# Altium PCB AVRDevBoard.PcbDoc (part 2 of 3)
Units mm, origin at the board's own origin, x right, y up, seen from the top; angles counter-clockwise.
Board outline 84.2 x 55.88 mm, 2 copper layers (Top Layer, Bottom Layer); 37 components, 46 nets, 157 pads, 38 vias.
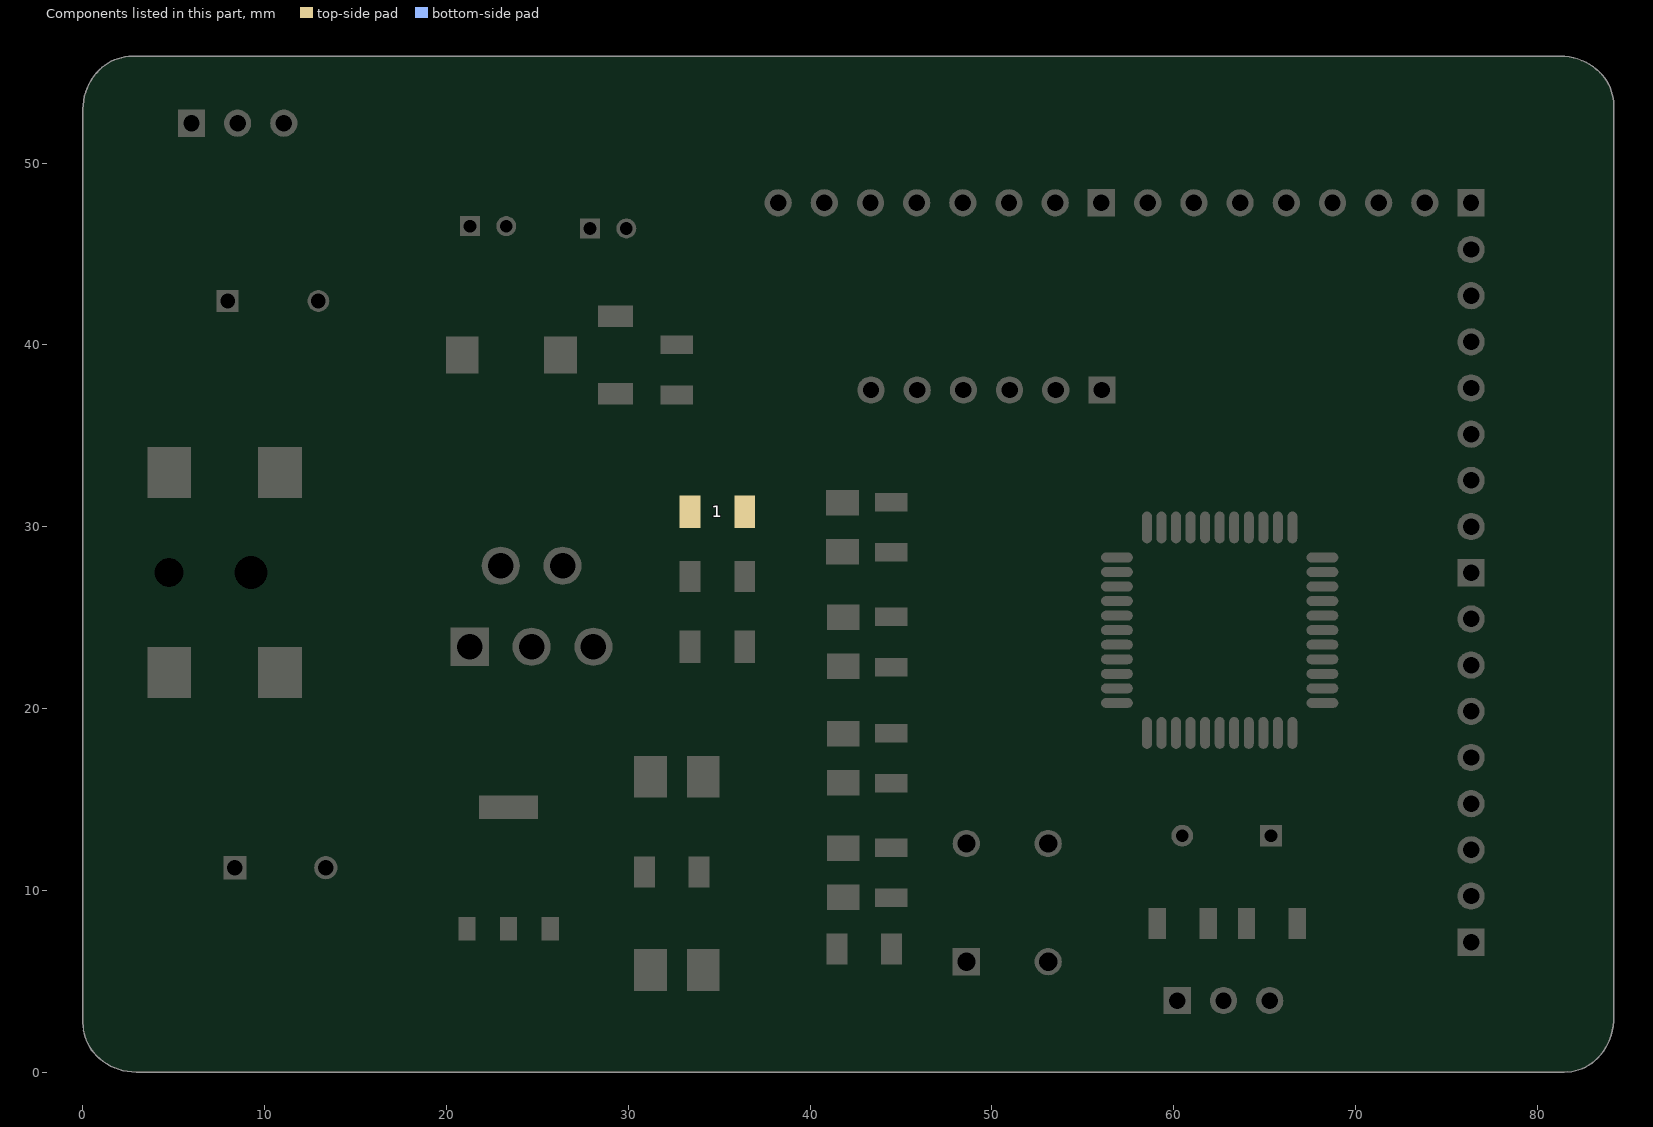
[diagram p2: the components of this part, seen from the top]

## Via types
v1: diameter 0.6, hole 0.3, Top Layer to Bottom Layer, 24 vias
v2: diameter 0.5, hole 0.3, Top Layer to Bottom Layer, 13 vias
v3: diameter 0.7, hole 0.4, Top Layer to Bottom Layer, 1 vias

## Nets (pads, with @x,y where several pads share a name; then routed paths per layer and width w, separated by ;. In a path a pad name is that pad's centre, name@x,y a point inside that pad or via, vN(x,y) a via of type N, cw(c..) or ccw(c..) an arc to the next point about the centre after c; other vN are vias at no path point) (continued)
copper on no net: (continued)
  Top Layer w0.025: 60.751,36.503 61.056,36.503 ; 60.751,36.528 61.03,36.528 ; 60.751,36.553 61.03,36.553 ; 60.751,36.579 61.03,36.579 ; 60.751,36.604 61.03,36.604 ; 60.751,36.63 61.03,36.63 ; 60.751,36.655 61.005,36.655 ; 60.751,36.68 61.005,36.68 ; 60.751,36.706 61.03,36.706 ; 60.751,36.731 61.005,36.731 ; 60.751,36.757 61.005,36.757 ; 60.751,36.782 61.005,36.782 ; 60.751,36.807 61.03,36.807 ; 60.751,36.833 61.005,36.833 ; 60.751,36.858 61.005,36.858 ; 60.751,36.884 61.005,36.884 ; 60.751,36.909 61.03,36.909 ; 60.751,36.934 61.03,36.934 ; 60.751,36.96 61.03,36.96 ; 60.751,36.985 61.03,36.985 ; 60.751,37.011 61.03,37.011 ; 60.751,37.036 61.03,37.036 ; 60.776,36.426 61.132,36.426 ; 60.776,36.452 61.132,36.452 ; 60.776,36.477 61.081,36.477 ; 60.776,37.061 61.132,37.061 ; 60.776,37.087 61.132,37.087 ; 60.802,36.35 61.615,36.35 ; 60.802,36.376 61.589,36.376 ; 60.802,36.401 61.64,36.401 ; 60.802,37.112 61.665,37.112 ; 60.802,37.138 61.64,37.138 ; 60.802,37.163 61.615,37.163 ; 60.853,36.299 61.564,36.299 ; 60.853,36.325 61.589,36.325 ; 60.853,37.188 61.589,37.188 ; 60.853,37.214 61.589,37.214 ; 60.903,36.274 61.513,36.274 ; 60.903,37.239 61.564,37.239 ; 60.903,37.265 61.564,37.265 ; 60.929,36.249 61.513,36.249 ; 60.98,37.29 61.462,37.29 ; 61.005,36.198 61.462,36.198 ; 61.005,36.223 61.462,36.223 ; 61.005,37.315 61.462,37.315 ; 61.081,37.341 61.335,37.341 ; 61.081,37.366 61.335,37.366 ; 61.132,36.172 61.284,36.172 ; 61.284,36.426 61.665,36.426 ; 61.284,36.452 61.665,36.452 ; 61.284,37.087 61.665,37.087 ; 61.31,37.061 61.665,37.061 ; 61.361,36.477 61.665,36.477 ; 61.361,36.503 61.665,36.503 ; 61.386,37.011 61.665,37.011 ; 61.386,37.036 61.665,37.036 ; 61.411,36.528 61.691,36.528 ; 61.411,36.553 61.691,36.553 ; 61.411,36.96 61.691,36.96 ; 61.411,36.985 61.691,36.985 ; 61.437,36.579 61.691,36.579 ; 61.437,36.604 61.691,36.604 ; 61.437,36.63 61.691,36.63 ; 61.437,36.655 61.691,36.655 ; 61.437,36.68 61.691,36.68 ; 61.437,36.706 61.691,36.706 ; 61.437,36.731 61.691,36.731 ; 61.437,36.757 61.691,36.757 ; 61.437,36.782 61.691,36.782 ; 61.437,36.807 61.691,36.807 ; 61.437,36.833 61.691,36.833 ; 61.437,36.858 61.691,36.858 ; 61.437,36.884 61.691,36.884 ; 61.437,36.909 61.691,36.909 ; 61.437,36.934 61.691,36.934 ; 61.869,34.445 62.123,34.445 ; 61.869,34.471 62.123,34.471 ; 61.869,34.496 62.123,34.496 ; 61.869,34.521 62.123,34.521 ; 61.869,34.547 62.123,34.547 ; 61.869,34.572 62.123,34.572 ; 61.869,34.598 62.123,34.598 ; 61.869,34.623 62.123,34.623 ; 61.869,34.648 62.123,34.648 ; 61.869,34.674 62.123,34.674 ; 61.869,34.699 62.123,34.699 ; 61.869,34.725 62.123,34.725 ; 61.869,34.75 62.123,34.75 ; 61.869,34.775 62.123,34.775 ; 61.869,34.801 62.123,34.801 ; 61.869,34.826 62.123,34.826 ; 61.869,34.852 62.123,34.852 ; 61.869,34.877 62.123,34.877 ; 61.869,34.902 62.123,34.902 ; 61.869,34.928 62.123,34.928 ; 61.869,34.953 62.123,34.953 ; 61.869,34.979 62.123,34.979 ; 61.869,35.004 62.123,35.004 ; 61.869,35.029 62.123,35.029 ; 61.869,35.055 62.123,35.055 ; 61.869,35.08 62.123,35.08 ; 61.869,35.106 62.123,35.106 ; 61.869,35.131 62.123,35.131 ; 61.869,35.156 62.123,35.156 ; 61.869,35.182 62.123,35.182 ; 61.869,35.207 62.173,35.207 ; 61.869,35.233 62.173,35.233 ; 61.869,35.258 62.224,35.258 ; 61.869,35.283 62.224,35.283 ; 61.869,35.309 62.326,35.309 ; 61.869,35.334 62.758,35.334 ; 61.869,35.36 62.758,35.36 ; 61.869,35.385 62.758,35.385 ; 61.869,35.41 62.758,35.41 ; 61.869,35.436 62.707,35.436 ; 61.869,35.461 62.681,35.461 ; 61.869,35.487 62.123,35.487 ; 61.869,35.512 62.123,35.512 ; 61.869,35.537 62.123,35.537 ; 61.869,35.563 62.123,35.563 ; 61.869,35.588 62.123,35.588 ; 61.869,35.614 62.123,35.614 ; 61.869,35.639 62.123,35.639 ; 61.869,35.664 62.123,35.664 ; 61.869,35.69 62.123,35.69 ; 61.869,35.715 62.123,35.715 ; 61.869,35.741 62.123,35.741 ; 61.869,35.766 62.123,35.766 ; 61.869,35.791 62.123,35.791 ; 61.869,35.817 62.123,35.817 ; 61.869,35.842 62.123,35.842 ; 61.869,35.868 62.123,35.868 ; 61.869,35.893 62.123,35.893 ; 61.869,35.918 62.123,35.918 ; 61.869,35.944 62.123,35.944 ; 61.869,35.969 62.123,35.969 ; 61.869,35.995 62.123,35.995 ; 61.869,36.02 62.123,36.02 ; 61.869,36.045 62.123,36.045 ; 61.869,36.071 62.123,36.071 ; 61.869,36.096 62.123,36.096 ; 61.869,36.122 62.123,36.122 ; 61.869,36.147 62.123,36.147 ; 61.869,36.172 62.123,36.172 ; 61.869,36.198 62.123,36.198 ; 61.869,36.223 62.123,36.223 ; 61.869,36.249 62.123,36.249 ; 61.869,36.274 62.656,36.274 ; 61.869,36.299 62.732,36.299 ; 61.869,36.325 62.732,36.325 ; 61.869,36.35 62.758,36.35 ; 61.869,36.376 62.758,36.376 ; 61.869,36.401 62.758,36.401 ; 61.869,36.426 62.25,36.426 ; 61.869,36.452 62.25,36.452 ; 61.869,36.477 62.199,36.477 ; 61.869,36.503 62.173,36.503 ; 61.869,36.528 62.148,36.528 ; 61.869,36.553 62.123,36.553 ; 61.869,36.579 62.123,36.579 ; 61.869,36.604 62.123,36.604 ; 61.869,36.63 62.123,36.63 ; 61.869,36.655 62.123,36.655 ; 61.869,36.68 62.123,36.68 ; 61.869,36.706 62.123,36.706 ; 61.869,36.731 62.123,36.731 ; 61.869,36.757 62.123,36.757 ; 61.869,36.782 62.123,36.782 ; 61.869,36.807 62.123,36.807 ; 61.869,36.833 62.123,36.833 ; 61.869,36.858 62.123,36.858 ; 61.869,36.884 62.123,36.884 ; 61.869,36.909 62.123,36.909 ; 61.869,36.934 62.123,36.934 ; 61.869,36.96 62.123,36.96 ; 61.869,36.985 62.123,36.985 ; 61.869,37.011 62.173,37.011 ; 61.869,37.036 62.173,37.036 ; 61.869,37.061 62.25,37.061 ; 61.869,37.087 62.25,37.087 ; 61.869,37.112 62.783,37.112 ; 61.869,37.138 62.758,37.138 ; 61.869,37.163 62.758,37.163 ; 61.869,37.188 62.732,37.188 ; 61.869,37.214 62.732,37.214 ; 61.869,37.239 62.681,37.239 ; 61.869,37.265 62.681,37.265 ; 61.869,37.29 62.123,37.29 ; 61.869,37.315 62.123,37.315 ; 61.894,34.394 62.123,34.394 ; 61.894,34.42 62.123,34.42 ; 61.894,37.366 61.919,37.366 ; 61.945,41.049 65.171,41.049 ; 61.945,41.075 65.171,41.075 ; 61.945,41.1 65.171,41.1 ; 61.945,41.125 65.12,41.125 ; 61.945,41.151 65.12,41.151 ; 61.945,41.176 65.12,41.176 ; 61.945,41.202 65.12,41.202 ; 61.945,41.227 65.094,41.227 ; 61.945,41.252 65.094,41.252 ; 61.945,41.278 65.094,41.278 ; 61.945,41.303 65.069,41.303 ; 61.945,41.329 65.069,41.329 ; 61.945,41.354 65.069,41.354 ; 61.945,41.379 65.069,41.379 ; 61.945,41.405 65.069,41.405 ; 61.945,41.43 65.069,41.43 ; 61.945,41.456 65.069,41.456 ; 61.945,41.481 65.069,41.481 ; 61.945,41.506 65.069,41.506 ; 61.945,41.532 65.069,41.532 ; 61.945,41.557 65.069,41.557 ; 61.945,41.583 65.069,41.583 ; 61.945,41.608 65.069,41.608 ; 61.945,41.633 65.069,41.633 ; 61.945,41.659 65.069,41.659 ; 61.945,41.684 65.069,41.684 ; 61.945,41.71 65.069,41.71 ; 61.945,41.735 65.069,41.735 ; 61.945,41.76 65.069,41.76 ; 61.945,41.786 65.069,41.786 ; 61.945,41.811 65.069,41.811 ; 61.945,41.837 65.069,41.837 ; 61.945,41.862 65.069,41.862 ; 61.945,41.887 65.094,41.887 ; 61.945,41.913 65.094,41.913 ; 61.945,41.938 65.094,41.938 ; 61.945,41.964 65.094,41.964 ; 61.945,41.989 65.12,41.989 ; 61.945,42.014 65.12,42.014 ; 61.945,42.04 65.12,42.04 ; 61.945,42.065 65.12,42.065 ; 61.945,42.091 65.171,42.091 ; 61.945,42.116 65.171,42.116 ; 61.945,42.141 65.171,42.141 ; 61.945,42.167 65.196,42.167 ; 61.996,40.998 65.196,40.998 ; 61.996,41.024 65.196,41.024 ; 61.996,42.192 65.221,42.192 ; 62.072,37.341 62.097,37.341 ; 62.072,37.366 62.097,37.366 ; 62.097,40.973 65.221,40.973 ; 62.097,42.218 65.221,42.218 ; 62.173,35.487 62.656,35.487 ; 62.173,35.512 62.656,35.512 ; 62.173,36.249 62.656,36.249 ; 62.173,37.29 62.656,37.29 ; 62.173,42.243 65.247,42.243 ; 62.224,36.198 62.605,36.198 ; 62.224,36.223 62.605,36.223 ; 62.224,37.315 62.605,37.315 ; 62.25,35.537 62.554,35.537 ; 62.25,40.948 65.247,40.948 ; 62.326,36.172 62.504,36.172 ; 62.326,37.341 62.504,37.341 ; 62.326,37.366 62.504,37.366 ; 62.326,42.268 65.247,42.268 ; 62.351,35.563 62.453,35.563 ; 62.351,40.922 65.272,40.922 ; 62.377,35.309 62.783,35.309 ; 62.427,36.426 62.783,36.426 ; 62.427,36.452 62.783,36.452 ; 62.427,37.087 62.783,37.087 ; 62.453,35.258 62.783,35.258 ; 62.453,35.283 62.783,35.283 ; 62.453,37.061 62.783,37.061 ; 62.453,40.897 65.272,40.897 ; 62.504,35.233 62.783,35.233 ; 62.504,36.477 62.783,36.477 ; 62.504,36.503 62.783,36.503 ; 62.504,37.011 62.783,37.011 ; 62.504,37.036 62.783,37.036 ; 62.504,42.294 65.272,42.294 ; 62.529,35.131 62.783,35.131 ; 62.529,35.156 62.783,35.156 ; 62.529,35.182 62.783,35.182 ; 62.529,35.207 62.783,35.207 ; 62.529,36.528 62.783,36.528 ; 62.529,36.553 62.783,36.553 ; 62.529,36.579 62.783,36.579 ; 62.529,36.604 62.783,36.604 ; 62.529,36.909 62.783,36.909 ; 62.529,36.934 62.783,36.934 ; 62.529,36.96 62.783,36.96 ; 62.529,36.985 62.783,36.985 ; 62.554,34.394 62.783,34.394 ; 62.554,34.42 62.783,34.42 ; 62.554,34.445 62.783,34.445 ; 62.554,34.471 62.783,34.471 ; 62.554,34.496 62.783,34.496 ; 62.554,34.521 62.783,34.521 ; 62.554,34.547 62.783,34.547 ; 62.554,34.572 62.783,34.572 ; 62.554,34.598 62.783,34.598 ; 62.554,34.623 62.783,34.623 ; 62.554,34.648 62.783,34.648 ; 62.554,34.674 62.783,34.674 ; 62.554,34.699 62.783,34.699 ; 62.554,34.725 62.783,34.725 ; 62.554,34.75 62.783,34.75 ; 62.554,34.775 62.783,34.775 ; 62.554,34.801 62.783,34.801 ; 62.554,34.826 62.783,34.826 ; 62.554,34.852 62.783,34.852 ; 62.554,34.877 62.783,34.877 ; 62.554,34.902 62.783,34.902 ; 62.554,34.928 62.783,34.928 ; 62.554,34.953 62.783,34.953 ; 62.554,34.979 62.783,34.979 ; 62.554,35.004 62.783,35.004 ; 62.554,35.029 62.783,35.029 ; 62.554,35.055 62.783,35.055 ; 62.554,35.08 62.783,35.08 ; 62.554,35.106 62.783,35.106 ; 62.554,36.63 62.783,36.63 ; 62.554,36.655 62.783,36.655 ; 62.554,36.68 62.783,36.68 ; 62.554,36.706 62.783,36.706 ; 62.554,36.731 62.834,36.731 ; 62.554,36.757 62.834,36.757 ; 62.554,36.782 62.834,36.782 ; 62.554,36.807 62.834,36.807 ; 62.554,36.833 62.783,36.833 ; 62.554,36.858 62.783,36.858 ; 62.554,36.884 62.783,36.884 ; 62.656,40.871 65.298,40.871 ; 62.707,42.319 65.298,42.319 ; 62.707,42.345 65.323,42.345 ; 62.783,39.017 65.171,39.017 ; 62.783,44.173 69.641,44.173 ; 62.783,44.199 69.641,44.199 ; 62.808,38.966 65.171,38.966 ; 62.808,38.992 65.171,38.992 ; 62.808,39.043 65.196,39.043 ; 62.808,39.068 65.196,39.068 ; 62.808,44.097 69.616,44.097 ; 62.808,44.123 69.616,44.123 ; 62.808,44.148 69.616,44.148 ; 62.808,44.224 69.616,44.224 ; 62.834,39.093 65.196,39.093 ; 62.834,39.119 65.221,39.119 ; 62.834,44.25 69.59,44.25 ; 62.859,38.941 65.171,38.941 ; 62.859,40.821 65.348,40.821 ; 62.859,40.846 65.298,40.846 ; 62.859,44.046 69.565,44.046 ; 62.859,44.072 69.565,44.072 ; 62.885,38.916 65.12,38.916 ; 62.885,39.144 65.247,39.144 ; 62.885,39.17 65.247,39.17 ; 62.885,39.195 65.247,39.195 ; 62.885,39.22 65.272,39.22 ; 62.885,42.37 65.348,42.37 ; 62.885,43.996 69.539,43.996 ; 62.885,44.021 69.539,44.021 ; 62.885,44.275 69.539,44.275 ; 62.885,44.3 69.539,44.3 ; 62.935,34.648 63.316,34.648 ; 62.935,34.674 63.215,34.674 ; 62.935,34.699 63.215,34.699 ; 62.935,34.725 63.215,34.725 ; 62.935,34.75 63.215,34.75 ; 62.935,34.775 63.215,34.775 ; 62.935,34.801 63.215,34.801 ; 62.935,36.579 63.215,36.579 ; 62.935,36.604 63.215,36.604 ; 62.935,36.63 63.215,36.63 ; 62.935,36.655 63.215,36.655 ; 62.935,36.68 63.926,36.68 ; 62.935,36.706 63.926,36.706 ; 62.935,36.731 63.926,36.731 ; 62.935,36.757 63.926,36.757 ; 62.935,36.782 63.926,36.782 ; 62.935,36.807 63.926,36.807 ; 62.935,36.833 63.926,36.833 ; 62.935,36.858 63.926,36.858 ; 62.935,36.884 63.926,36.884 ; 62.935,36.909 63.215,36.909 ; 62.935,36.934 63.215,36.934 ; 62.935,38.865 65.12,38.865 ; 62.935,38.89 65.12,38.89 ; 62.935,39.246 65.272,39.246 ; 62.935,43.945 69.489,43.945 ; 62.935,43.97 69.489,43.97 ; 62.935,44.326 69.489,44.326 ; 62.935,44.351 69.489,44.351 ; 62.961,34.572 63.875,34.572 ; 62.961,34.598 63.875,34.598 ; 62.961,34.623 63.875,34.623 ; 62.961,34.826 63.215,34.826 ; 62.961,34.852 63.215,34.852 ; 62.961,34.877 63.875,34.877 ; 62.961,36.503 63.266,36.503 ; 62.961,36.528 63.215,36.528 ; 62.961,36.553 63.215,36.553 ; 62.961,36.96 63.215,36.96 ; 62.961,36.985 63.215,36.985 ; 62.961,37.011 63.215,37.011 ; 62.961,37.036 63.215,37.036 ; 62.961,38.814 65.094,38.814 ; 62.961,38.839 65.094,38.839 ; 62.961,39.271 65.272,39.271 ; 62.986,34.547 63.875,34.547 ; 62.986,34.902 63.875,34.902 ; 62.986,34.928 63.875,34.928 ; 62.986,34.953 63.875,34.953 ; 62.986,35.36 63.85,35.36 ; 62.986,35.385 63.85,35.385 ; 62.986,35.41 63.85,35.41 ; 62.986,36.401 63.85,36.401 ; 62.986,36.426 63.316,36.426 ; 62.986,36.452 63.316,36.452 ; 62.986,36.477 63.266,36.477 ; 62.986,37.061 63.316,37.061 ; 62.986,37.087 63.316,37.087 ; 62.986,37.112 63.85,37.112 ; 62.986,37.138 63.85,37.138 ; 62.986,38.789 65.094,38.789 ; 62.986,39.297 65.298,39.297 ; 62.986,39.322 65.298,39.322 ; 62.986,39.347 65.298,39.347 ; 62.986,42.395 65.348,42.395 ; 62.986,43.843 69.438,43.843 ; 62.986,43.869 69.438,43.869 ; 62.986,43.894 69.438,43.894 ; 62.986,43.919 69.463,43.919 ; 62.986,44.377 64.586,44.377 ; 62.986,44.402 64.51,44.402 ; 63.037,34.496 63.875,34.496 ; 63.037,34.521 63.875,34.521 ; 63.037,34.979 63.875,34.979 ; 63.037,35.334 63.85,35.334 ; 63.037,35.436 63.062,35.436 ; 63.037,36.35 63.875,36.35 ; 63.037,36.376 63.875,36.376 ; 63.037,37.163 63.824,37.163 ; 63.037,38.763 64.459,38.763 ; 63.037,39.373 65.348,39.373 ; 63.037,39.398 65.348,39.398 ; 63.037,39.424 65.348,39.424 ; 63.037,40.795 65.348,40.795 ; 63.037,43.767 69.387,43.767 ; 63.037,43.792 69.387,43.792 ; 63.037,43.818 69.387,43.818 ; 63.037,44.427 64.485,44.427 ; 63.037,44.453 64.485,44.453 ; 63.088,34.445 63.875,34.445 ; 63.088,34.471 63.875,34.471 ; 63.088,35.004 63.875,35.004 ; 63.088,35.029 63.875,35.029 ; 63.088,35.309 63.266,35.309 ; 63.088,35.436 63.799,35.436 ; 63.088,35.461 63.774,35.461 ; 63.088,36.299 63.85,36.299 ; 63.088,36.325 63.85,36.325 ; 63.088,37.188 63.774,37.188 ; 63.088,37.214 63.774,37.214 ; 63.088,38.712 64.434,38.712 ; 63.088,38.738 64.459,38.738 ; 63.088,39.449 65.348,39.449 ; 63.088,39.474 65.399,39.474 ; 63.088,40.719 65.425,40.719 ; 63.088,40.744 65.399,40.744 ; 63.088,40.77 65.399,40.77 ; 63.088,43.716 69.336,43.716 ; 63.088,43.742 69.336,43.742 ; 63.088,44.478 64.409,44.478 ; 63.113,35.487 63.748,35.487 ; 63.113,35.512 63.748,35.512 ; 63.113,36.274 63.748,36.274 ; 63.113,37.239 63.748,37.239 ; 63.113,37.265 63.748,37.265 ; 63.113,38.687 64.358,38.687 ; 63.113,39.5 65.399,39.5 ; 63.113,40.643 65.552,40.643 ; 63.113,40.668 65.501,40.668 ; 63.113,40.694 65.45,40.694 ; 63.113,42.421 65.399,42.421 ; 63.113,42.446 65.399,42.446 ; 63.113,42.472 65.45,42.472 ; 63.113,42.497 65.501,42.497 ; 63.113,43.665 69.311,43.665 ; 63.113,43.691 69.311,43.691 ; 63.113,44.504 64.358,44.504 ; 63.113,44.529 64.358,44.529 ; 63.139,35.258 63.215,35.258 ; 63.139,35.283 63.215,35.283 ; 63.139,36.249 63.748,36.249 ; 63.139,38.636 64.307,38.636 ; 63.139,38.662 64.307,38.662 ; 63.139,39.525 65.399,39.525 ; 63.139,39.551 65.399,39.551 ; 63.139,40.541 65.704,40.541 ; 63.139,40.567 65.602,40.567 ; 63.139,40.592 65.602,40.592 ; 63.139,40.617 65.552,40.617 ; 63.139,42.522 65.526,42.522 ; 63.139,42.548 65.526,42.548 ; 63.139,43.615 69.285,43.615 ; 63.139,43.64 69.285,43.64 ; 63.139,44.554 64.307,44.554 ; 63.164,34.42 63.596,34.42 ; 63.164,35.055 63.875,35.055 ; 63.164,35.08 63.875,35.08 ; 63.164,37.29 63.647,37.29 ; 63.164,39.576 65.399,39.576 ; 63.164,42.573 65.602,42.573 ; 63.164,42.599 65.602,42.599 ; 63.189,35.537 63.647,35.537 ; 63.189,38.611 64.256,38.611 ; 63.189,39.601 65.399,39.601 ; 63.189,40.465 65.729,40.465 ; 63.189,40.49 65.729,40.49 ; 63.189,40.516 65.729,40.516 ; 63.189,42.624 65.704,42.624 ; 63.189,42.649 65.729,42.649 ; 63.189,43.589 69.235,43.589 ; 63.189,44.58 64.256,44.58 ; 63.215,34.394 63.52,34.394 ; 63.215,36.198 63.697,36.198 ; 63.215,36.223 63.697,36.223 ; 63.215,37.315 63.647,37.315 ; 63.215,38.585 64.231,38.585 ; 63.215,39.627 65.399,39.627 ; 63.215,39.652 65.425,39.652 ; 63.215,39.678 65.45,39.678 ; 63.215,40.338 65.729,40.338 ; 63.215,40.363 65.729,40.363 ; 63.215,40.389 65.729,40.389 ; 63.215,40.414 65.729,40.414 ; 63.215,40.44 65.78,40.44 ; 63.215,42.675 65.831,42.675 ; 63.215,42.7 65.831,42.7 ; 63.215,42.726 65.933,42.726 ; 63.215,43.513 69.209,43.513 ; 63.215,43.538 69.209,43.538 ; 63.215,43.564 69.209,43.564 ; 63.215,44.605 64.205,44.605 ; 63.215,44.631 64.205,44.631 ; 63.266,38.535 64.18,38.535 ; 63.266,38.56 64.18,38.56 ; 63.266,39.703 65.45,39.703 ; 63.266,39.728 65.501,39.728 ; 63.266,40.287 65.729,40.287 ; 63.266,40.313 65.729,40.313 ; 63.266,42.751 69.158,42.751 ; 63.266,42.776 69.158,42.776 ; 63.266,42.802 69.158,42.802 ; 63.266,42.827 69.158,42.827 ; 63.266,43.488 69.158,43.488 ; 63.266,44.656 64.155,44.656 ; 63.266,44.681 64.155,44.681 ; 63.291,38.484 64.104,38.484 ; 63.291,38.509 64.104,38.509 ; 63.291,39.754 65.501,39.754 ; 63.291,39.779 65.501,39.779 ; 63.291,40.186 65.679,40.186 ; 63.291,40.211 65.679,40.211 ; 63.291,40.236 65.704,40.236 ; 63.291,40.262 65.704,40.262 ; 63.291,42.853 69.133,42.853 ; 63.291,42.878 69.133,42.878 ; 63.291,43.411 69.133,43.411 ; 63.291,43.437 69.133,43.437 ; 63.291,43.462 69.158,43.462 ; 63.316,37.341 63.52,37.341 ; 63.316,37.366 63.52,37.366 ; 63.316,38.458 64.028,38.458 ; 63.316,39.805 65.501,39.805 ; 63.316,39.83 65.526,39.83 ; 63.316,40.109 65.628,40.109 ; 63.316,40.135 65.628,40.135 ; 63.316,40.16 65.628,40.16 ; 63.316,42.903 69.108,42.903 ; 63.316,42.929 69.108,42.929 ; 63.316,42.954 69.108,42.954 ; 63.316,42.98 69.108,42.98 ; 63.316,43.005 69.108,43.005 ; 63.316,43.386 69.108,43.386 ; 63.316,44.707 64.078,44.707 ; 63.316,44.732 64.028,44.732 ; 63.342,35.563 63.469,35.563 ; 63.342,36.172 63.545,36.172 ; 63.367,38.433 64.002,38.433 ; 63.367,39.855 65.526,39.855 ; 63.367,39.881 65.526,39.881 ; 63.367,39.982 65.577,39.982 ; 63.367,40.008 65.602,40.008 ; 63.367,40.033 65.602,40.033 ; 63.367,40.059 65.602,40.059 ; 63.367,40.084 65.602,40.084 ; 63.367,43.03 69.057,43.03 ; 63.367,43.056 69.057,43.056 ; 63.367,43.081 69.057,43.081 ; 63.367,43.107 69.057,43.107 ; 63.367,43.284 69.057,43.284 ; 63.367,43.31 69.057,43.31 ; 63.367,43.335 69.057,43.335 ; 63.367,43.361 69.057,43.361 ; 63.367,44.758 63.977,44.758 ; 63.367,44.783 63.977,44.783 ; 63.418,38.382 63.977,38.382 ; 63.418,38.408 63.977,38.408 ; 63.418,39.906 65.552,39.906 ; 63.418,39.932 65.552,39.932 ; 63.418,39.957 65.577,39.957 ; 63.418,43.132 69.006,43.132 ; 63.418,43.157 69.006,43.157 ; 63.418,43.183 69.006,43.183 ; 63.418,43.208 69.006,43.208 ; 63.418,43.234 69.006,43.234 ; 63.418,43.259 69.006,43.259 ; 63.418,44.808 63.926,44.808 ; 63.443,38.357 63.875,38.357 ; 63.443,44.834 63.875,44.834 ; 63.443,44.859 63.875,44.859 ; 63.469,38.306 63.85,38.306 ; 63.469,38.331 63.85,38.331 ; 63.469,44.885 63.85,44.885 ; 63.52,38.281 63.774,38.281 ; 63.52,44.91 63.774,44.91 ; 63.545,34.648 63.875,34.648 ; 63.545,35.309 63.875,35.309 ; 63.545,37.061 63.875,37.061 ; 63.545,37.087 63.85,37.087 ; 63.545,38.255 63.748,38.255 ; 63.545,44.935 63.748,44.935 ; 63.545,44.961 63.748,44.961 ; 63.596,35.258 63.875,35.258 ; 63.596,35.283 63.875,35.283 ; 63.596,36.426 63.799,36.426 ; 63.596,36.452 63.799,36.452 ; 63.596,37.011 63.875,37.011 ; 63.596,37.036 63.875,37.036 ; 63.596,38.204 63.672,38.204 ; 63.596,38.23 63.672,38.23 ; 63.596,44.986 63.672,44.986 ; 63.596,45.012 63.672,45.012 ; 63.621,34.394 63.875,34.394 ; 63.621,34.42 63.875,34.42 ; 63.621,34.674 63.875,34.674 ; 63.621,34.699 63.875,34.699 ; 63.621,34.725 63.875,34.725 ; 63.621,34.75 63.875,34.75 ; 63.621,34.775 63.875,34.775 ; 63.621,34.801 63.875,34.801 ; 63.621,34.826 63.875,34.826 ; 63.621,34.852 63.875,34.852 ; 63.621,35.106 63.875,35.106 ; 63.621,35.131 63.875,35.131 ; 63.621,35.156 63.875,35.156 ; 63.621,35.182 63.875,35.182 ; 63.621,35.207 63.875,35.207 ; 63.621,35.233 63.875,35.233 ; 63.621,36.934 63.875,36.934 ; 63.621,36.96 63.875,36.96 ; 63.621,36.985 63.875,36.985 ; 63.647,36.477 63.748,36.477 ; 63.647,36.503 63.748,36.503 ; 63.647,36.909 63.875,36.909 ; 64.053,36.198 64.307,36.198 ; 64.053,36.223 64.307,36.223 ; 64.053,36.249 64.307,36.249 ; 64.053,36.274 64.307,36.274 ; 64.053,36.299 64.307,36.299 ; 64.053,36.325 64.307,36.325 ; 64.053,36.35 64.307,36.35 ; 64.053,36.376 64.307,36.376 ; 64.053,36.401 64.307,36.401 ; 64.053,36.426 64.307,36.426 ; 64.053,36.452 64.307,36.452 ; 64.053,36.477 64.307,36.477 ; 64.053,36.503 64.307,36.503 ; 64.053,36.528 64.307,36.528 ; 64.053,36.553 64.307,36.553 ; 64.053,36.579 64.307,36.579 ; 64.053,36.604 64.307,36.604 ; 64.053,36.63 64.307,36.63 ; 64.053,36.655 64.307,36.655 ; 64.053,36.68 64.307,36.68 ; 64.053,36.706 64.307,36.706 ; 64.053,36.731 64.307,36.731 ; 64.053,36.757 64.307,36.757 ; 64.053,36.782 64.307,36.782 ; 64.053,36.807 64.307,36.807 ; 64.053,36.833 64.307,36.833 ; 64.053,36.858 64.307,36.858 ; 64.053,36.884 64.307,36.884 ; 64.053,36.909 64.307,36.909 ; 64.053,36.934 64.307,36.934 ; 64.053,36.96 64.358,36.96 ; 64.053,36.985 64.358,36.985 ; 64.053,37.011 64.358,37.011 ; 64.053,37.036 64.358,37.036 ; 64.053,37.061 64.459,37.061 ; 64.053,37.087 64.459,37.087 ; 64.053,37.112 64.967,37.112 ; 64.053,37.138 64.967,37.138 ; 64.053,37.163 64.942,37.163 ; 64.053,37.188 64.942,37.188 ; 64.053,37.214 64.942,37.214 ; 64.053,37.239 64.917,37.239 ; 64.053,37.265 64.891,37.265 ; 64.053,37.29 64.307,37.29 ; 64.053,37.315 64.332,37.315 ; 64.078,34.42 64.358,34.42 ; 64.078,34.445 64.358,34.445 ; 64.078,34.471 64.358,34.471 ; 64.078,34.496 64.358,34.496 ; 64.078,34.521 64.358,34.521 ; 64.078,34.547 64.358,34.547 ; 64.078,34.572 64.358,34.572 ; 64.078,34.598 64.358,34.598 ; 64.078,34.623 64.358,34.623 ; 64.078,34.648 64.358,34.648 ; 64.078,34.674 64.358,34.674 ; 64.078,34.699 64.358,34.699 ; 64.078,34.725 64.358,34.725 ; 64.078,34.75 64.358,34.75 ; 64.078,34.775 64.358,34.775 ; 64.078,34.801 64.358,34.801 ; 64.078,34.826 64.358,34.826 ; 64.078,34.852 64.358,34.852 ; 64.078,34.877 64.358,34.877 ; 64.078,34.902 64.358,34.902 ; 64.078,34.928 64.358,34.928 ; 64.078,34.953 64.358,34.953 ; 64.078,34.979 64.358,34.979 ; 64.078,35.004 64.358,35.004 ; 64.078,35.029 64.358,35.029 ; 64.078,35.055 64.358,35.055 ; 64.078,35.08 64.358,35.08 ; 64.078,35.106 64.358,35.106 ; 64.078,35.131 64.358,35.131 ; 64.078,35.156 64.358,35.156 ; 64.078,35.182 64.358,35.182 ; 64.078,35.207 64.409,35.207 ; 64.078,35.233 64.409,35.233 ; 64.078,35.258 64.434,35.258 ; 64.078,35.283 64.434,35.283 ; 64.078,35.309 64.536,35.309 ; 64.078,35.334 64.79,35.334 ; 64.078,35.36 64.84,35.36 ; 64.078,35.385 64.84,35.385 ; 64.078,35.41 64.866,35.41 ; 64.078,35.436 64.358,35.436 ; 64.078,35.461 64.358,35.461 ; 64.078,35.487 64.358,35.487 ; 64.078,35.512 64.358,35.512 ; 64.104,34.394 64.358,34.394 ; 64.104,35.537 64.358,35.537 ; 64.104,37.341 64.129,37.341 ; 64.104,37.366 64.129,37.366 ; 64.383,35.436 64.917,35.436 ; 64.383,35.461 64.917,35.461 ; 64.409,35.487 64.866,35.487 ; 64.409,35.512 64.866,35.512 ; 64.409,37.29 64.84,37.29 ; 64.409,37.315 64.79,37.315 ; 64.51,35.537 64.79,35.537 ; 64.51,37.341 64.713,37.341 ; 64.51,37.366 64.713,37.366 ; 64.586,38.763 65.069,38.763 ; 64.612,35.309 64.79,35.309 ; 64.612,35.563 64.688,35.563 ; 64.637,37.061 64.967,37.061 ; 64.637,37.087 64.967,37.087 ; 64.637,44.377 67.787,44.377 ; 64.663,38.712 65.069,38.712 ; 64.663,38.738 65.069,38.738 ; 64.688,35.258 64.739,35.258 ; 64.688,35.283 64.764,35.283 ; 64.713,36.985 65.018,36.985 ; 64.713,37.011 65.018,37.011 ; 64.713,37.036 65.018,37.036 ; 64.713,38.687 65.069,38.687 ; 64.739,36.198 65.018,36.198 ; 64.739,36.223 65.018,36.223 ; 64.739,36.249 65.018,36.249 ; 64.739,36.274 65.018,36.274 ; 64.739,36.299 65.018,36.299 ; 64.739,36.325 65.018,36.325 ; 64.739,36.35 65.018,36.35 ; 64.739,36.376 65.018,36.376 ; 64.739,36.401 65.018,36.401 ; 64.739,36.426 65.018,36.426 ; 64.739,36.452 65.018,36.452 ; 64.739,36.477 65.018,36.477 ; 64.739,36.503 65.018,36.503 ; 64.739,36.528 65.018,36.528 ; 64.739,36.553 65.018,36.553 ; 64.739,36.579 65.018,36.579 ; 64.739,36.604 65.018,36.604 ; 64.739,36.63 65.018,36.63 ; 64.739,36.655 65.018,36.655 ; 64.739,36.68 65.018,36.68 ; 64.739,36.706 65.018,36.706 ; 64.739,36.731 65.018,36.731 ; 64.739,36.757 65.018,36.757 ; 64.739,36.782 65.018,36.782 ; 64.739,36.807 65.018,36.807 ; 64.739,36.833 65.018,36.833 ; 64.739,36.858 65.018,36.858 ; 64.739,36.884 65.018,36.884 ; 64.739,36.909 65.018,36.909 ; 64.739,36.934 65.018,36.934 ; 64.739,36.96 65.018,36.96 ; 64.739,44.402 67.685,44.402 ; 64.79,38.636 65.018,38.636 ; 64.79,38.662 65.018,38.662 ; 64.815,44.427 67.609,44.427 ; 64.84,44.453 67.584,44.453 ; 64.866,34.877 65.171,34.877 ; 64.866,34.902 65.171,34.902 ; 64.866,34.928 65.171,34.928 ; 64.866,34.953 65.171,34.953 ; 64.866,34.979 65.171,34.979 ; 64.866,35.004 65.171,35.004 ; 64.866,35.029 65.171,35.029 ; 64.866,35.055 65.171,35.055 ; 64.866,38.611 65.018,38.611 ; 64.891,34.648 65.831,34.648 ; 64.891,34.674 65.196,34.674 ; 64.891,34.699 65.196,34.699 ; 64.891,34.725 65.171,34.725 ; 64.891,34.75 65.171,34.75 ; 64.891,34.775 65.171,34.775 ; 64.891,34.801 65.171,34.801 ; 64.891,34.826 65.171,34.826 ; 64.891,34.852 65.171,34.852 ; 64.891,35.08 65.171,35.08 ; 64.891,35.106 65.171,35.106 ; 64.891,35.131 65.171,35.131 ; 64.891,35.156 65.171,35.156 ; 64.891,35.182 65.171,35.182 ; 64.891,35.207 65.171,35.207 ; 64.891,35.233 65.196,35.233 ; 64.891,35.258 65.221,35.258 ; 64.891,35.283 65.221,35.283 ; 64.891,35.309 65.298,35.309 ; 64.942,34.572 65.831,34.572 ; 64.942,34.598 65.831,34.598 ; 64.942,34.623 65.831,34.623 ; 64.942,35.334 65.831,35.334 ; 64.942,35.36 65.831,35.36 ; 64.942,35.385 65.831,35.385 ; 64.942,38.585 64.967,38.585 ; 64.942,44.478 67.482,44.478 ; 64.967,34.496 65.831,34.496 ; 64.967,34.521 65.831,34.521 ; 64.967,34.547 65.831,34.547 ; 64.967,35.41 65.831,35.41 ; 64.967,35.436 65.831,35.436 ; 64.967,44.504 67.431,44.504 ; 64.967,44.529 64.993,44.529 ; 64.993,35.461 65.831,35.461 ; 65.018,44.529 67.431,44.529 ; 65.044,34.445 65.526,34.445 ; 65.044,34.471 65.526,34.471 ; 65.044,35.487 65.501,35.487 ; 65.044,35.512 65.501,35.512 ; 65.069,34.42 65.501,34.42 ; 65.069,44.554 67.355,44.554 ; 65.12,35.537 65.45,35.537 ; 65.171,34.394 65.399,34.394 ; 65.171,44.58 67.253,44.58 ; 65.221,35.563 65.323,35.563 ; 65.272,44.605 67.152,44.605 ; 65.272,44.631 67.152,44.631 ; 65.348,44.656 67.076,44.656 ; 65.374,44.681 67.05,44.681 ; 65.399,35.309 65.831,35.309 ; 65.399,44.707 67.025,44.707 ; 65.399,44.732 67.025,44.732 ; 65.399,44.758 67.025,44.758 ; 65.399,44.783 67.025,44.783 ; 65.399,44.808 67.025,44.808 ; 65.45,44.834 66.974,44.834 ; 65.45,44.859 66.974,44.859 ; 65.45,44.885 66.974,44.885 ; 65.45,44.91 66.974,44.91 ; 65.45,44.935 66.974,44.935 ; 65.45,44.961 66.974,44.961 ; 65.45,44.986 66.974,44.986 ; 65.45,45.012 66.974,45.012 ; 65.475,35.258 65.831,35.258 ; 65.475,35.283 65.831,35.283 ; 65.475,45.037 66.949,45.037 ; 65.475,45.062 66.949,45.062 ; 65.475,45.088 66.949,45.088 ; 65.475,45.113 66.949,45.113 ; 65.475,45.139 66.949,45.139 ; 65.475,45.164 66.949,45.164 ; 65.501,34.674 65.831,34.674 ; 65.501,34.699 65.831,34.699 ; 65.501,34.725 65.831,34.725 ; 65.501,34.75 65.831,34.75 ; 65.501,35.207 65.831,35.207 ; 65.501,35.233 65.831,35.233 ; 65.501,45.189 66.949,45.189 ; 65.501,45.215 66.949,45.215 ; 65.501,45.24 66.923,45.24 ; 65.501,45.266 66.923,45.266 ; 65.501,45.291 66.923,45.291 ; 65.501,45.316 66.923,45.316 ; 65.501,45.342 66.923,45.342 ; 65.501,45.367 66.923,45.367 ; 65.501,45.393 66.923,45.393 ; 65.501,45.418 66.872,45.418 ; 65.552,34.394 65.831,34.394 ; 65.552,34.42 65.831,34.42 ; 65.552,34.445 65.831,34.445 ; 65.552,34.471 65.831,34.471 ; 65.552,34.775 65.831,34.775 ; 65.552,34.801 65.831,34.801 ; 65.552,34.826 65.831,34.826 ; 65.552,34.852 65.831,34.852 ; 65.552,34.877 65.831,34.877 ; 65.552,34.902 65.831,34.902 ; 65.552,34.928 65.831,34.928 ; 65.552,34.953 65.831,34.953 ; 65.552,34.979 65.831,34.979 ; 65.552,35.004 65.831,35.004 ; 65.552,35.029 65.831,35.029 ; 65.552,35.055 65.831,35.055 ; 65.552,35.08 65.831,35.08 ; 65.552,35.106 65.831,35.106 ; 65.552,35.131 65.831,35.131 ; 65.552,35.156 65.831,35.156 ; 65.552,35.182 65.831,35.182 ; 65.552,35.487 65.831,35.487 ; 65.552,35.512 65.831,35.512 ; 65.552,35.537 65.831,35.537 ; 65.552,35.563 65.831,35.563 ; 65.552,35.588 65.831,35.588 ; 65.552,35.614 65.831,35.614 ; 65.552,35.639 65.831,35.639 ; 65.552,35.664 65.831,35.664 ; 65.552,35.69 65.831,35.69 ; 65.552,35.715 65.831,35.715 ; 65.552,35.741 65.831,35.741 ; 65.552,35.766 65.831,35.766 ; 65.552,35.791 65.831,35.791 ; 65.552,35.817 65.831,35.817 ; 65.552,35.842 65.831,35.842 ; 65.552,35.868 65.831,35.868 ; 65.552,35.893 65.831,35.893 ; 65.552,35.918 65.831,35.918 ; 65.552,35.944 65.831,35.944 ; 65.552,35.969 65.831,35.969 ; 65.552,35.995 65.831,35.995 ; 65.552,36.02 65.806,36.02 ; 65.552,45.443 66.872,45.443 ; 65.552,45.469 66.872,45.469 ; 65.552,45.494 66.872,45.494 ; 65.552,45.52 66.872,45.52 ; 65.552,45.545 66.872,45.545 ; 65.552,45.57 66.872,45.57 ; 65.552,45.596 66.872,45.596 ; 65.602,36.35 66.542,36.35 ; 65.602,36.376 66.542,36.376 ; 65.602,36.401 66.593,36.401 ; 65.602,45.621 66.822,45.621 ; 65.602,45.647 66.822,45.647 ; 65.602,45.672 66.822,45.672 ; 65.602,45.697 66.822,45.697 ; 65.602,45.723 66.822,45.723 ; 65.602,45.748 66.822,45.748 ; 65.602,45.774 66.822,45.774 ; 65.602,45.799 66.822,45.799 ; 65.602,45.824 66.822,45.824 ; 65.653,36.299 66.491,36.299 ; 65.653,36.325 66.491,36.325 ; 65.653,36.426 65.958,36.426 ; 65.653,36.452 65.958,36.452 ; 65.653,36.96 65.933,36.96 ; 65.653,36.985 65.933,36.985 ; 65.653,37.011 65.933,37.011 ; 65.653,37.036 65.933,37.036 ; 65.653,37.061 65.958,37.061 ; 65.679,36.934 65.983,36.934 ; 65.704,36.477 65.882,36.477 ; 65.704,36.503 65.882,36.503 ; 65.704,36.833 66.466,36.833 ; 65.704,36.858 66.364,36.858 ; 65.704,36.884 66.364,36.884 ; 65.704,36.909 65.983,36.909 ; 65.704,37.087 65.958,37.087 ; 65.704,37.112 66.491,37.112 ; 65.704,37.138 66.491,37.138 ; 65.704,37.163 66.542,37.163 ; 65.729,36.274 66.466,36.274 ; 65.729,36.528 65.78,36.528 ; 65.729,36.553 65.78,36.553 ; 65.729,36.782 66.491,36.782 ; 65.729,36.807 66.491,36.807 ; 65.729,37.188 66.593,37.188 ; 65.729,37.214 66.568,37.214 ; 65.78,36.249 66.441,36.249 ; 65.78,36.731 66.542,36.731 ; 65.78,36.757 66.491,36.757 ; 65.78,37.239 66.491,37.239 ; 65.78,37.265 66.491,37.265 ; 65.831,36.198 66.364,36.198 ; 65.831,37.29 66.466,37.29 ; 65.882,36.223 66.364,36.223 ; 65.882,36.68 66.593,36.68 ; 65.882,36.706 66.593,36.706 ; 65.882,37.315 66.39,37.315 ; 65.933,35.385 66.212,35.385 ; 65.933,35.41 66.212,35.41 ; 65.933,35.436 66.212,35.436 ; 65.933,35.461 66.212,35.461 ; 65.933,35.487 66.212,35.487 ; 65.933,35.512 66.212,35.512 ; 65.933,35.537 66.187,35.537 ; 65.983,35.258 66.263,35.258 ; 65.983,35.283 66.263,35.283 ; 65.983,35.309 66.263,35.309 ; 65.983,35.334 66.263,35.334 ; 65.983,35.36 66.263,35.36 ; 65.983,37.341 66.263,37.341 ; 65.983,37.366 66.263,37.366 ; 66.009,36.172 66.212,36.172 ; 66.034,35.156 66.288,35.156 ; 66.034,35.182 66.288,35.182 ; 66.034,35.207 66.263,35.207 ; 66.034,35.233 66.263,35.233 ; 66.06,35.004 66.339,35.004 ; 66.06,35.029 66.339,35.029 ; 66.06,35.055 66.339,35.055 ; 66.06,35.08 66.339,35.08 ; 66.06,35.106 66.288,35.106 ; 66.06,35.131 66.288,35.131 ; 66.085,34.928 66.364,34.928 ; 66.085,34.953 66.364,34.953 ; 66.085,34.979 66.339,34.979 ; 66.11,34.902 66.364,34.902 ; 66.11,36.63 66.593,36.63 ; 66.11,36.655 66.593,36.655 ; 66.136,34.801 66.618,34.801 ; 66.136,34.826 66.39,34.826 ; 66.136,34.852 66.39,34.852 ; 66.136,34.877 66.364,34.877 ; 66.161,34.674 66.593,34.674 ; 66.161,34.699 66.593,34.699 ; 66.161,34.725 66.618,34.725 ; 66.161,34.75 66.618,34.75 ; 66.161,34.775 66.618,34.775 ; 66.212,34.572 66.542,34.572 ; 66.212,34.598 66.593,34.598 ; 66.212,34.623 66.593,34.623 ; 66.212,34.648 66.593,34.648 ; 66.237,34.471 66.542,34.471 ; 66.237,34.496 66.542,34.496 ; 66.237,34.521 66.542,34.521 ; 66.237,34.547 66.542,34.547 ; 66.263,34.394 66.491,34.394 ; 66.263,34.42 66.491,34.42 ; 66.263,34.445 66.542,34.445 ; 66.263,36.426 66.593,36.426 ; 66.263,36.452 66.593,36.452 ; 66.263,37.061 66.491,37.061 ; 66.263,37.087 66.491,37.087 ; 66.314,36.477 66.593,36.477 ; 66.314,36.503 66.593,36.503 ; 66.314,36.579 66.593,36.579 ; 66.314,36.604 66.593,36.604 ; 66.364,36.528 66.593,36.528 ; 66.364,36.553 66.593,36.553 ; 66.364,37.036 66.441,37.036 ; 66.39,37.011 66.441,37.011 ; 66.415,34.826 66.644,34.826 ; 66.415,34.852 66.644,34.852 ; 66.415,34.877 66.669,34.877 ; 66.415,34.902 66.669,34.902 ; 66.415,34.928 66.669,34.928 ; 66.441,34.953 66.695,34.953 ; 66.466,34.979 66.695,34.979 ; 66.466,35.004 66.695,35.004 ; 66.466,35.029 66.695,35.029 ; 66.466,35.055 66.695,35.055 ; 66.466,35.08 66.695,35.08 ; 66.491,35.106 66.72,35.106 ; 66.491,35.131 66.72,35.131 ; 66.491,35.156 66.72,35.156 ; 66.491,35.182 66.949,35.182 ; 66.491,42.726 69.209,42.726 ; 66.542,35.207 66.949,35.207 ; 66.542,35.233 66.949,35.233 ; 66.542,35.258 66.923,35.258 ; 66.542,35.283 66.923,35.283 ; 66.568,35.309 66.923,35.309 ; 66.568,35.334 66.923,35.334 ; 66.568,35.36 66.923,35.36 ; 66.568,35.385 66.872,35.385 ; 66.593,35.41 66.872,35.41 ; 66.593,35.436 66.872,35.436 ; 66.593,35.461 66.872,35.461 ; 66.593,35.487 66.822,35.487 ; 66.593,35.512 66.822,35.512 ; 66.593,42.675 69.209,42.675 ; 66.593,42.7 69.209,42.7 ; 66.644,35.537 66.822,35.537 ; 66.644,40.44 69.209,40.44 ; 66.695,36.503 67.025,36.503 ; 66.695,36.528 66.974,36.528 ; 66.695,36.553 66.974,36.553 ; 66.695,36.579 66.974,36.579 ; 66.695,36.604 66.974,36.604 ; 66.695,36.63 66.974,36.63 ; 66.695,36.655 66.974,36.655 ; 66.695,36.68 66.974,36.68 ; 66.695,36.706 66.974,36.706 ; 66.695,36.731 66.974,36.731 ; 66.695,36.757 66.949,36.757 ; 66.695,36.782 66.949,36.782 ; 66.695,36.807 66.949,36.807 ; 66.695,36.833 66.974,36.833 ; 66.695,36.858 66.974,36.858 ; 66.695,36.884 66.974,36.884 ; 66.695,36.909 66.974,36.909 ; 66.695,36.934 66.974,36.934 ; 66.695,36.96 66.974,36.96 ; 66.695,36.985 66.974,36.985 ; 66.695,37.011 67.025,37.011 ; 66.695,37.036 67.025,37.036 ; 66.695,40.287 69.158,40.287 ; 66.695,40.313 69.158,40.313 ; 66.695,40.338 69.209,40.338 ; 66.695,40.363 69.209,40.363 ; 66.695,40.389 69.209,40.389 ; 66.695,40.414 69.209,40.414 ; 66.695,40.465 69.235,40.465 ; 66.695,40.49 69.235,40.49 ; 66.695,40.516 69.235,40.516 ; 66.695,42.649 69.235,42.649 ; 66.72,36.477 67.025,36.477 ; 66.72,40.236 69.133,40.236 ; 66.72,40.262 69.133,40.262 ; 66.72,40.541 69.26,40.541 ; 66.72,42.624 69.235,42.624 ; 66.745,35.055 66.974,35.055 ; 66.745,35.08 66.974,35.08 ; 66.745,35.106 66.974,35.106 ; 66.745,35.131 66.974,35.131 ; 66.745,35.156 66.949,35.156 ; 66.745,36.401 67.609,36.401 ; 66.745,36.426 67.126,36.426 ; 66.745,36.452 67.126,36.452 ; 66.745,37.061 67.101,37.061 ; 66.745,37.087 67.126,37.087 ; 66.745,37.112 67.609,37.112 ; 66.745,37.138 67.584,37.138 ; 66.745,40.186 69.133,40.186 ; 66.745,40.211 69.133,40.211 ; 66.796,34.928 67.025,34.928 ; 66.796,34.953 67.025,34.953 ; 66.796,34.979 67.025,34.979 ; 66.796,35.004 67.025,35.004 ; 66.796,35.029 67.025,35.029 ; 66.796,36.35 67.584,36.35 ; 66.796,36.376 67.584,36.376 ; 66.796,37.163 67.584,37.163 ; 66.796,40.109 69.108,40.109 ; 66.796,40.135 69.108,40.135 ; 66.796,40.16 69.108,40.16 ; 66.822,34.775 67.05,34.775 ; 66.822,34.801 67.05,34.801 ; 66.822,34.826 67.05,34.826 ; 66.822,34.852 67.05,34.852 ; 66.822,34.877 67.05,34.877 ; 66.822,34.902 67.025,34.902 ; 66.822,36.299 67.533,36.299 ; 66.822,36.325 67.558,36.325 ; 66.822,37.188 67.533,37.188 ; 66.822,37.214 67.533,37.214 ; 66.822,40.008 69.057,40.008 ; 66.822,40.033 69.057,40.033 ; 66.822,40.059 69.057,40.059 ; 66.822,40.084 69.057,40.084 ; 66.822,40.567 69.285,40.567 ; 66.822,40.592 69.285,40.592 ; 66.822,42.573 69.26,42.573 ; 66.822,42.599 69.26,42.599 ; 66.847,34.674 67.279,34.674 ; 66.847,34.699 67.279,34.699 ; 66.847,34.725 67.304,34.725 ; 66.847,34.75 67.304,34.75 ; 66.847,39.957 69.006,39.957 ; 66.847,39.982 69.006,39.982 ; 66.872,36.274 67.482,36.274 ; 66.872,37.239 67.533,37.239 ; 66.872,37.265 67.482,37.265 ; 66.872,39.906 69.006,39.906 ; 66.872,39.932 69.006,39.932 ; 66.872,40.617 69.285,40.617 ; 66.872,40.643 69.311,40.643 ; 66.898,34.572 67.253,34.572 ; 66.898,34.598 67.253,34.598 ; 66.898,34.623 67.253,34.623 ; 66.898,34.648 67.279,34.648 ; 66.898,36.249 67.457,36.249 ; 66.898,39.83 69.108,39.83 ; 66.898,39.855 69.057,39.855 ; 66.898,39.881 69.057,39.881 ; 66.898,42.522 69.285,42.522 ; 66.898,42.548 69.285,42.548 ; 66.923,34.445 67.203,34.445 ; 66.923,34.471 67.203,34.471 ; 66.923,34.496 67.253,34.496 ; 66.923,34.521 67.253,34.521 ; 66.923,34.547 67.253,34.547 ; 66.923,37.29 67.457,37.29 ; 66.923,39.728 69.158,39.728 ; 66.923,39.754 69.133,39.754 ; 66.923,39.779 69.133,39.779 ; 66.923,39.805 69.108,39.805 ; 66.923,40.668 69.311,40.668 ; 66.923,42.497 69.311,42.497 ; 66.974,34.394 67.203,34.394 ; 66.974,34.42 67.203,34.42 ; 66.974,36.198 67.406,36.198 ; 66.974,36.223 67.406,36.223 ; 66.974,37.315 67.431,37.315 ; 66.974,39.678 69.209,39.678 ; 66.974,39.703 69.158,39.703 ; 66.974,40.694 69.311,40.694 ; 66.974,42.472 69.311,42.472 ; 66.999,39.652 69.209,39.652 ; 66.999,40.719 69.336,40.719 ; 67.025,39.474 69.336,39.474 ; 67.025,39.5 69.311,39.5 ; 67.025,39.525 69.285,39.525 ; 67.025,39.551 69.285,39.551 ; 67.025,39.576 69.26,39.576 ; 67.025,39.601 69.235,39.601 ; 67.025,39.627 69.209,39.627 ; 67.025,40.744 69.336,40.744 ; 67.025,40.77 69.336,40.77 ; 67.025,42.421 69.311,42.421 ; 67.025,42.446 69.311,42.446 ; 67.05,37.341 67.304,37.341 ; 67.05,37.366 67.304,37.366 ; 67.076,34.775 67.304,34.775 ; 67.076,34.801 67.304,34.801 ; 67.076,34.826 67.355,34.826 ; 67.076,34.852 67.355,34.852 ; 67.076,39.373 69.387,39.373 ; 67.076,39.398 69.387,39.398 ; 67.076,39.424 69.387,39.424 ; 67.076,39.449 69.336,39.449 ; 67.076,40.795 69.387,40.795 ; 67.076,40.821 69.565,40.821 ; 67.076,42.37 69.539,42.37 ; 67.076,42.395 69.489,42.395 ; 67.101,36.172 67.253,36.172 ; 67.101,42.345 69.743,42.345 ; 67.126,34.877 67.355,34.877 ; 67.126,34.902 67.355,34.902 ; 67.126,34.928 67.355,34.928 ; 67.126,34.953 67.38,34.953 ; 67.126,34.979 67.38,34.979 ; 67.126,39.297 69.438,39.297 ; 67.126,39.322 69.438,39.322 ; 67.126,39.347 69.438,39.347 ; 67.126,40.846 69.565,40.846 ; 67.126,40.871 69.768,40.871 ; 67.126,42.319 69.743,42.319 ; 67.152,35.004 67.38,35.004 ; 67.152,35.029 67.38,35.029 ; 67.152,35.055 67.406,35.055 ; 67.152,35.08 67.431,35.08 ; 67.152,35.106 67.431,35.106 ; 67.152,35.131 67.431,35.131 ; 67.152,39.22 69.539,39.22 ; 67.152,39.246 69.489,39.246 ; 67.152,39.271 69.463,39.271 ; 67.152,40.897 69.971,40.897 ; 67.152,40.922 70.073,40.922 ; 67.152,42.294 69.92,42.294 ; 67.177,35.156 67.457,35.156 ; 67.177,35.182 67.457,35.182 ; 67.177,35.207 67.457,35.207 ; 67.177,39.144 69.539,39.144 ; 67.177,39.17 69.539,39.17 ; 67.177,39.195 69.539,39.195 ; 67.177,40.948 70.149,40.948 ; 67.177,42.243 70.251,42.243 ; 67.177,42.268 70.098,42.268 ; 67.203,35.233 67.457,35.233 ; 67.203,39.119 69.59,39.119 ; 67.203,40.973 70.327,40.973 ; 67.203,42.192 70.428,42.192 ; 67.203,42.218 70.327,42.218 ; 67.228,35.258 67.457,35.258 ; 67.228,35.283 67.457,35.283 ; 67.228,35.309 67.482,35.309 ; 67.228,35.334 67.482,35.334 ; 67.228,35.36 67.482,35.36 ; 67.228,35.385 67.482,35.385 ; 67.228,39.043 69.616,39.043 ; 67.228,39.068 69.616,39.068 ; 67.228,39.093 69.59,39.093 ; 67.228,40.998 70.428,40.998 ; 67.228,41.024 70.428,41.024 ; 67.228,42.167 70.479,42.167 ; 67.253,35.41 67.533,35.41 ; 67.253,35.436 67.533,35.436 ; 67.253,35.461 67.533,35.461 ; 67.253,35.487 67.533,35.487 ; 67.253,35.512 67.533,35.512 ; 67.253,35.537 67.558,35.537 ; 67.253,36.426 67.634,36.426 ; 67.253,36.452 67.634,36.452 ; 67.253,37.087 67.634,37.087 ; 67.253,38.941 69.565,38.941 ; 67.253,38.966 69.616,38.966 ; 67.253,38.992 69.616,38.992 ; 67.253,39.017 69.641,39.017 ; 67.253,41.049 70.479,41.049 ; 67.253,41.075 70.479,41.075 ; 67.253,41.1 70.479,41.1 ; 67.253,42.091 70.479,42.091 ; 67.253,42.116 70.479,42.116 ; 67.253,42.141 70.479,42.141 ; 67.304,37.061 67.634,37.061 ; 67.304,38.865 69.489,38.865 ; 67.304,38.89 69.489,38.89 ; 67.304,38.916 69.539,38.916 ; 67.304,41.125 70.479,41.125 ; 67.304,41.151 70.479,41.151 ; 67.304,41.176 70.479,41.176 ; 67.304,41.202 70.479,41.202 ; 67.304,41.989 70.479,41.989 ; 67.304,42.014 70.479,42.014 ; 67.304,42.04 70.479,42.04 ; 67.304,42.065 70.479,42.065 ; 67.33,36.477 67.634,36.477 ; 67.33,38.814 69.463,38.814 ; 67.33,38.839 69.463,38.839 ; 67.33,41.227 70.479,41.227 ; 67.33,41.252 70.479,41.252 ; 67.33,41.278 70.479,41.278 ; 67.33,41.887 70.479,41.887 ; 67.33,41.913 70.479,41.913 ; 67.33,41.938 70.479,41.938 ; 67.33,41.964 70.479,41.964 ; 67.355,36.503 67.634,36.503 ; 67.355,36.528 67.634,36.528 ; 67.355,36.553 67.634,36.553 ; 67.355,36.985 67.685,36.985 ; 67.355,37.011 67.634,37.011 ; 67.355,37.036 67.634,37.036 ; 67.355,38.687 67.711,38.687 ; 67.355,38.712 67.787,38.712 ; 67.355,38.738 67.787,38.738 ; 67.355,38.763 67.838,38.763 ; 67.355,38.789 69.438,38.789 ; 67.355,41.303 70.479,41.303 ; 67.355,41.329 70.479,41.329 ; 67.355,41.354 70.479,41.354 ; 67.355,41.379 70.479,41.379 ; 67.355,41.405 70.479,41.405 ; 67.355,41.43 70.479,41.43 ; 67.355,41.456 70.479,41.456 ; 67.355,41.481 70.479,41.481 ; 67.355,41.506 70.479,41.506 ; 67.355,41.532 70.479,41.532 ; 67.355,41.557 70.479,41.557 ; 67.355,41.583 70.479,41.583 ; 67.355,41.608 70.479,41.608 ; 67.355,41.633 70.479,41.633 ; 67.355,41.659 70.479,41.659 ; 67.355,41.684 70.479,41.684 ; 67.355,41.71 70.479,41.71 ; 67.355,41.735 70.479,41.735 ; 67.355,41.76 70.479,41.76 ; 67.355,41.786 70.479,41.786 ; 67.355,41.811 70.479,41.811 ; 67.355,41.837 70.479,41.837 ; 67.355,41.862 70.479,41.862 ; 67.38,36.96 67.685,36.96 ; 67.406,36.579 67.685,36.579 ; 67.406,36.604 67.685,36.604 ; 67.406,36.63 67.685,36.63 ; 67.406,36.655 67.685,36.655 ; 67.406,36.68 67.685,36.68 ; 67.406,36.706 67.685,36.706 ; 67.406,36.731 67.685,36.731 ; 67.406,36.757 67.685,36.757 ; 67.406,36.782 67.685,36.782 ; 67.406,36.807 67.685,36.807 ; 67.406,36.833 67.685,36.833 ; 67.406,36.858 67.685,36.858 ; 67.406,36.884 67.685,36.884 ; 67.406,36.909 67.685,36.909 ; 67.406,36.934 67.685,36.934 ; 67.406,38.611 67.558,38.611 ; 67.406,38.636 67.634,38.636 ; 67.406,38.662 67.634,38.662 ; 67.457,38.585 67.482,38.585 ; 67.558,34.598 68.498,34.598 ; 67.558,34.623 68.498,34.623 ; 67.558,34.648 67.914,34.648 ; 67.558,34.674 67.812,34.674 ; 67.558,34.699 67.787,34.699 ; 67.558,34.725 67.787,34.725 ; 67.558,34.75 67.787,34.75 ; 67.558,34.775 67.787,34.775 ; 67.558,34.801 67.787,34.801 ; 67.558,34.826 67.812,34.826 ; 67.558,34.852 67.812,34.852 ; 67.558,34.877 68.498,34.877 ; 67.584,34.547 68.498,34.547 ; 67.584,34.572 68.498,34.572 ; 67.584,34.902 68.498,34.902 ; 67.584,34.928 68.498,34.928 ; 67.584,35.385 68.447,35.385 ; 67.634,34.496 68.498,34.496 ; 67.634,34.521 68.498,34.521 ; 67.634,34.953 68.498,34.953 ; 67.634,35.36 68.473,35.36 ; 67.634,35.41 68.447,35.41 ; 67.634,35.436 68.396,35.436 ; 67.66,34.445 68.498,34.445 ; 67.66,34.471 68.498,34.471 ; 67.66,34.979 68.498,34.979 ; 67.66,35.334 68.473,35.334 ; 67.66,35.461 68.371,35.461 ; 67.685,35.004 68.498,35.004 ; 67.685,35.029 68.498,35.029 ; 67.685,35.309 67.888,35.309 ; 67.685,35.487 68.346,35.487 ; 67.685,35.512 68.346,35.512 ; 67.736,34.42 68.168,34.42 ; 67.736,35.258 67.812,35.258 ; 67.736,35.283 67.812,35.283 ; 67.787,35.055 68.498,35.055 ; 67.787,35.08 68.498,35.08 ; 67.787,35.537 68.244,35.537 ; 67.812,34.394 68.142,34.394 ; 67.838,36.426 68.219,36.426 ; 67.838,36.452 68.219,36.452 ; 67.838,36.477 68.142,36.477 ; 67.838,36.503 68.142,36.503 ; 67.838,36.528 68.117,36.528 ; 67.838,36.553 68.117,36.553 ; 67.838,36.579 68.117,36.579 ; 67.838,36.604 68.117,36.604 ; 67.838,36.63 68.117,36.63 ; 67.838,36.655 68.117,36.655 ; 67.838,36.68 68.117,36.68 ; 67.838,36.706 68.117,36.706 ; 67.838,36.731 68.117,36.731 ; 67.838,36.757 68.117,36.757 ; 67.838,36.782 68.117,36.782 ; 67.838,36.807 68.117,36.807 ; 67.838,36.833 68.117,36.833 ; 67.838,36.858 68.117,36.858 ; 67.838,36.884 68.117,36.884 ; 67.838,36.909 68.117,36.909 ; 67.838,36.934 68.117,36.934 ; 67.838,36.96 68.117,36.96 ; 67.838,36.985 68.117,36.985 ; 67.838,37.011 68.117,37.011 ; 67.838,37.036 68.117,37.036 ; 67.838,37.061 68.117,37.061 ; 67.838,37.087 68.117,37.087 ; 67.838,37.112 68.117,37.112 ; 67.838,37.138 68.117,37.138 ; 67.838,37.163 68.117,37.163 ; 67.838,37.188 68.117,37.188 ; 67.838,37.214 68.117,37.214 ; 67.838,37.239 68.117,37.239 ; 67.838,37.265 68.117,37.265 ; 67.838,37.29 68.117,37.29 ; 67.838,37.315 68.117,37.315 ; 67.863,37.341 67.888,37.341 ; 67.863,37.366 67.888,37.366 ; 67.863,44.377 69.438,44.377 ; 67.888,36.35 68.777,36.35 ; 67.888,36.376 68.777,36.376 ; 67.888,36.401 68.777,36.401 ; 67.914,35.563 68.117,35.563 ; 67.914,36.299 68.777,36.299 ; 67.914,36.325 68.777,36.325 ; 67.914,44.402 69.438,44.402 ; 67.939,44.427 69.387,44.427 ; 67.939,44.453 69.387,44.453 ; 67.965,36.274 68.777,36.274 ; 67.965,38.738 69.336,38.738 ; 67.965,38.763 69.387,38.763 ; 67.99,36.249 68.473,36.249 ; 67.99,38.712 69.336,38.712 ; 68.015,36.198 68.447,36.198 ; 68.015,44.478 69.336,44.478 ; 68.041,37.341 68.066,37.341 ; 68.041,37.366 68.066,37.366 ; 68.066,36.223 68.447,36.223 ; 68.066,38.687 69.311,38.687 ; 68.066,44.504 69.311,44.504 ; 68.066,44.529 69.311,44.529 ; 68.117,34.648 68.498,34.648 ; 68.117,38.636 69.285,38.636 ; 68.117,38.662 69.285,38.662 ; 68.117,44.554 69.285,44.554 ; 68.142,35.309 68.473,35.309 ; 68.142,36.172 68.346,36.172 ; 68.168,38.611 69.235,38.611 ; 68.168,44.58 69.235,44.58 ; 68.193,38.585 69.209,38.585 ; 68.219,34.674 68.498,34.674 ; 68.219,34.699 68.498,34.699 ; 68.219,34.725 68.498,34.725 ; 68.219,34.75 68.498,34.75 ; 68.219,34.775 68.498,34.775 ; 68.219,34.801 68.498,34.801 ; 68.219,34.826 68.498,34.826 ; 68.219,34.852 68.498,34.852 ; 68.219,35.131 68.498,35.131 ; 68.219,35.156 68.498,35.156 ; 68.219,35.182 68.498,35.182 ; 68.219,35.207 68.473,35.207 ; 68.219,35.233 68.473,35.233 ; 68.219,35.258 68.473,35.258 ; 68.219,35.283 68.473,35.283 ; 68.219,44.605 69.209,44.605 ; 68.219,44.631 69.209,44.631 ; 68.244,34.394 68.473,34.394 ; 68.244,34.42 68.473,34.42 ; 68.244,35.106 68.498,35.106 ; 68.269,38.535 69.158,38.535 ; 68.269,38.56 69.158,38.56 ; 68.269,44.656 69.158,44.656 ; 68.269,44.681 69.158,44.681 ; 68.32,38.484 69.133,38.484 ; 68.32,38.509 69.133,38.509 ; 68.346,44.707 69.108,44.707 ; 68.396,36.426 68.777,36.426 ; 68.396,36.452 68.777,36.452 ; 68.396,38.458 69.108,38.458 ; 68.396,44.732 69.108,44.732 ; 68.422,38.433 69.057,38.433 ; 68.447,36.477 68.777,36.477 ; 68.447,36.503 68.777,36.503 ; 68.447,38.382 69.006,38.382 ; 68.447,38.408 69.006,38.408 ; 68.447,44.758 69.057,44.758 ; 68.447,44.783 69.057,44.783 ; 68.498,36.198 68.777,36.198 ; 68.498,36.223 68.777,36.223 ; 68.498,36.249 68.777,36.249 ; 68.498,36.528 68.777,36.528 ; 68.498,36.553 68.777,36.553 ; 68.498,36.579 68.777,36.579 ; 68.498,36.604 68.777,36.604 ; 68.498,36.63 68.777,36.63 ; 68.498,36.655 68.777,36.655 ; 68.498,36.68 68.777,36.68 ; 68.498,36.706 68.777,36.706 ; 68.498,36.731 68.777,36.731 ; 68.498,36.757 68.777,36.757 ; 68.498,36.782 68.777,36.782 ; 68.498,36.807 68.777,36.807 ; 68.498,36.833 68.777,36.833 ; 68.498,36.858 68.777,36.858 ; 68.498,36.884 68.777,36.884 ; 68.498,36.909 68.777,36.909 ; 68.498,36.934 68.777,36.934 ; 68.498,36.96 68.777,36.96 ; 68.498,36.985 68.777,36.985 ; 68.498,37.011 68.777,37.011 ; 68.498,37.036 68.777,37.036 ; 68.498,37.061 68.777,37.061 ; 68.498,37.087 68.777,37.087 ; 68.498,37.112 68.777,37.112 ; 68.498,37.138 68.777,37.138 ; 68.498,37.163 68.777,37.163 ; 68.498,37.188 68.777,37.188 ; 68.498,37.214 68.777,37.214 ; 68.498,37.239 68.777,37.239 ; 68.498,37.265 68.777,37.265 ; 68.498,37.29 68.777,37.29 ; 68.498,37.315 68.777,37.315 ; 68.498,44.808 69.006,44.808 ; 68.549,37.341 68.574,37.341 ; 68.549,37.366 68.574,37.366 ; 68.549,38.357 68.981,38.357 ; 68.549,44.834 68.981,44.834 ; 68.549,44.859 68.981,44.859 ; 68.574,38.306 68.955,38.306 ; 68.574,38.331 68.955,38.331 ; 68.6,44.885 68.955,44.885 ; 68.65,38.281 68.904,38.281 ; 68.65,44.91 68.904,44.91 ; 68.676,38.255 68.879,38.255 ; 68.676,44.935 68.879,44.935 ; 68.676,44.961 68.879,44.961 ; 68.727,34.394 68.981,34.394 ; 68.727,34.42 68.981,34.42 ; 68.727,34.445 68.981,34.445 ; 68.727,34.471 68.981,34.471 ; 68.727,34.496 68.981,34.496 ; 68.727,34.521 68.981,34.521 ; 68.727,34.547 68.981,34.547 ; 68.727,34.572 68.981,34.572 ; 68.727,34.598 68.981,34.598 ; 68.727,34.623 68.981,34.623 ; 68.727,34.648 68.981,34.648 ; 68.727,34.674 68.981,34.674 ; 68.727,34.699 68.981,34.699 ; 68.727,34.725 68.981,34.725 ; 68.727,34.75 68.981,34.75